# Altium PCB DRA818V Ham module.PcbDoc
Units mil, origin at the board's own origin, x right, y up, seen from the top; angles counter-clockwise.
Board outline 2870 x 2785 mil, 2 copper layers (Top Layer, Bottom Layer), stack 65.792 mil thick; 47 components, 29 nets, 159 pads, 92 vias.
Unrouted connection lines stored in the file: 1.
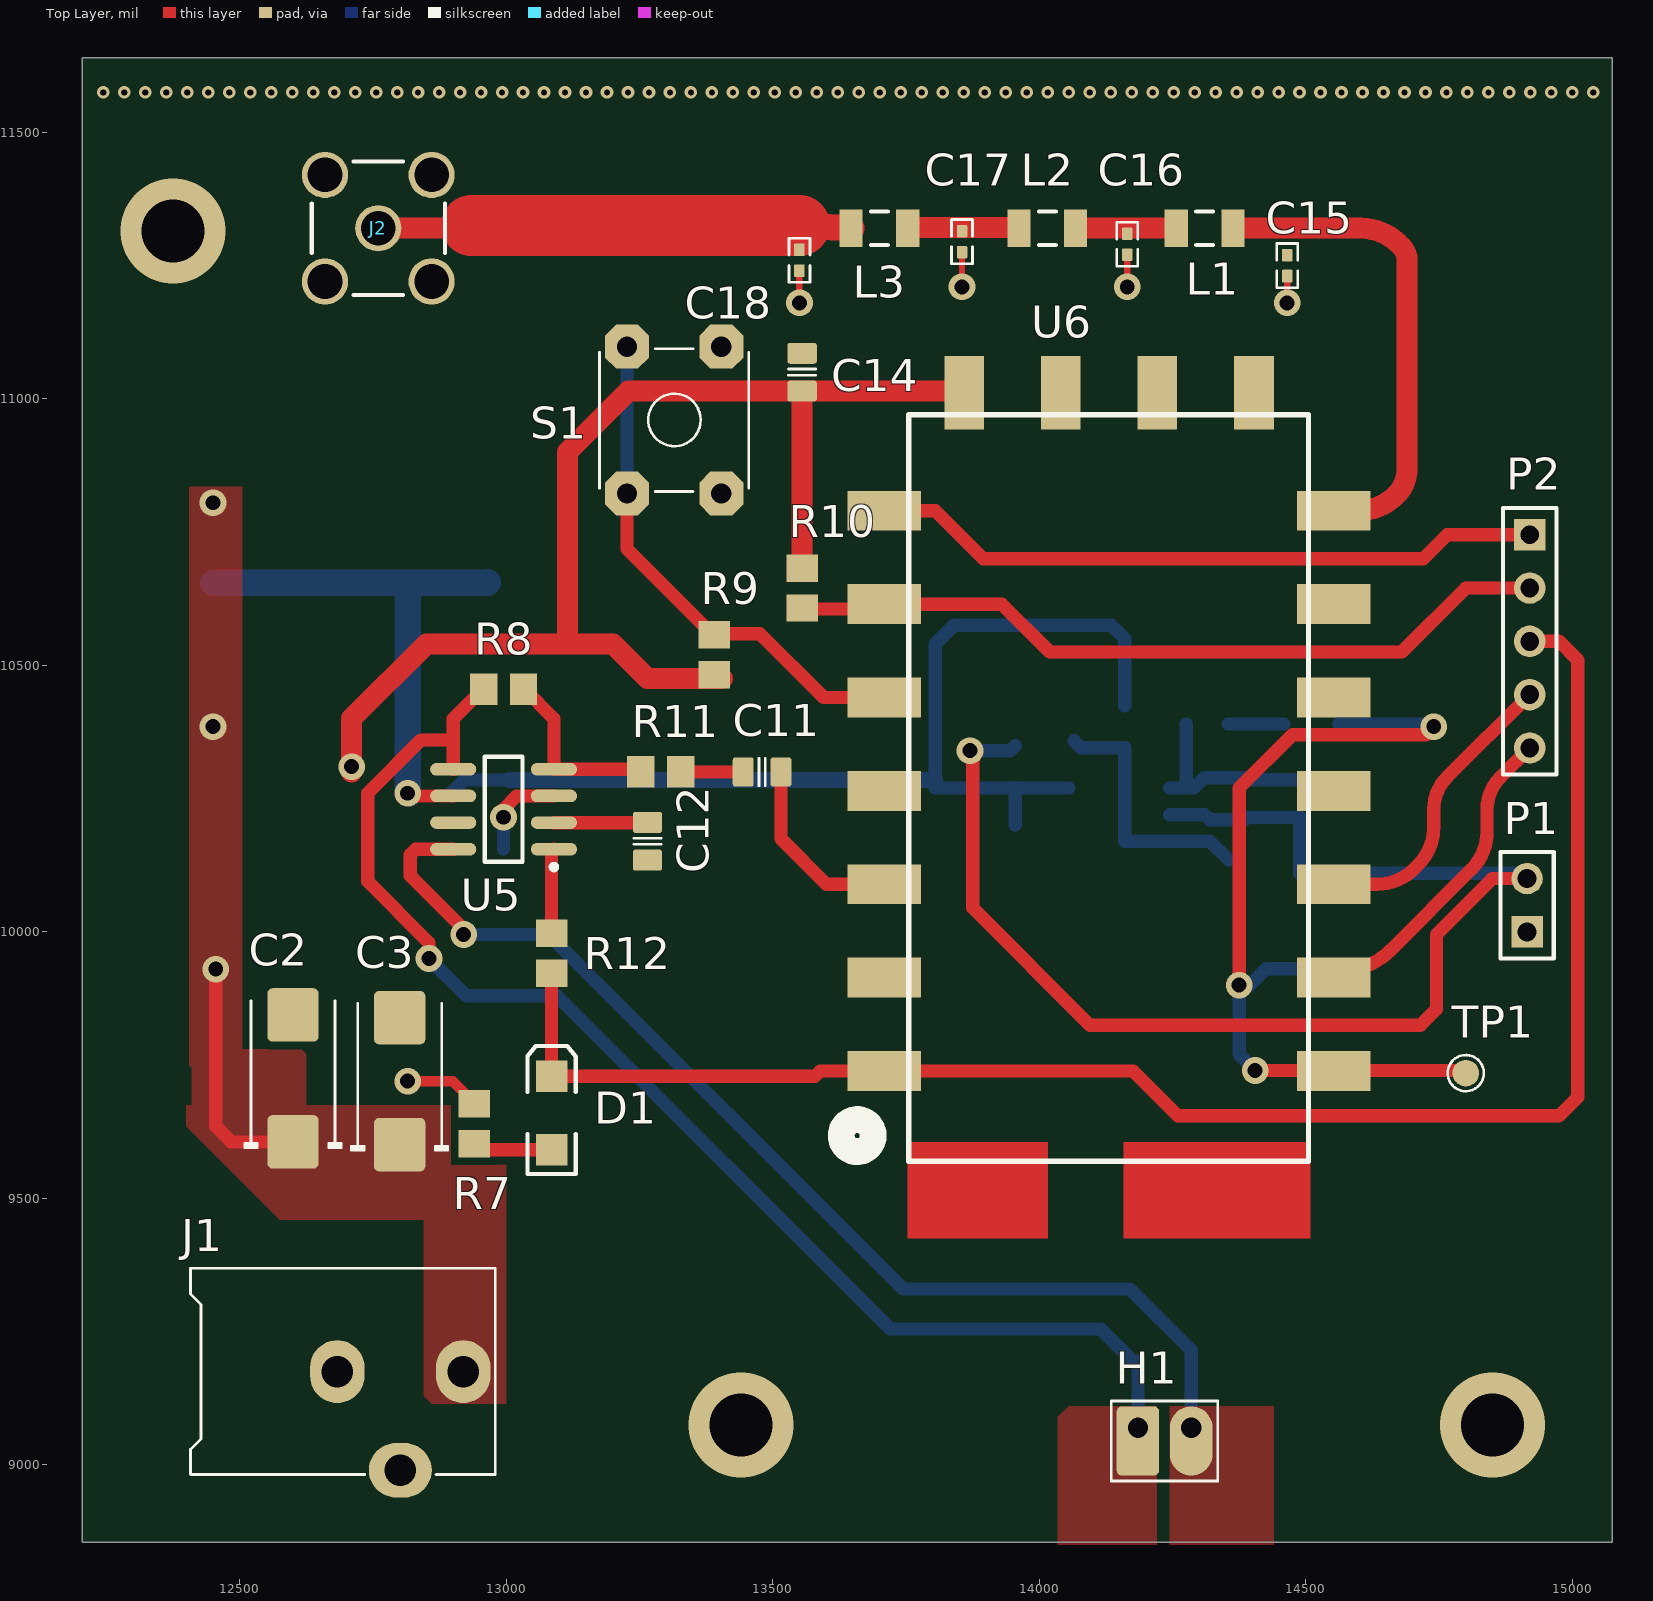
[diagram p0: Top Layer view]
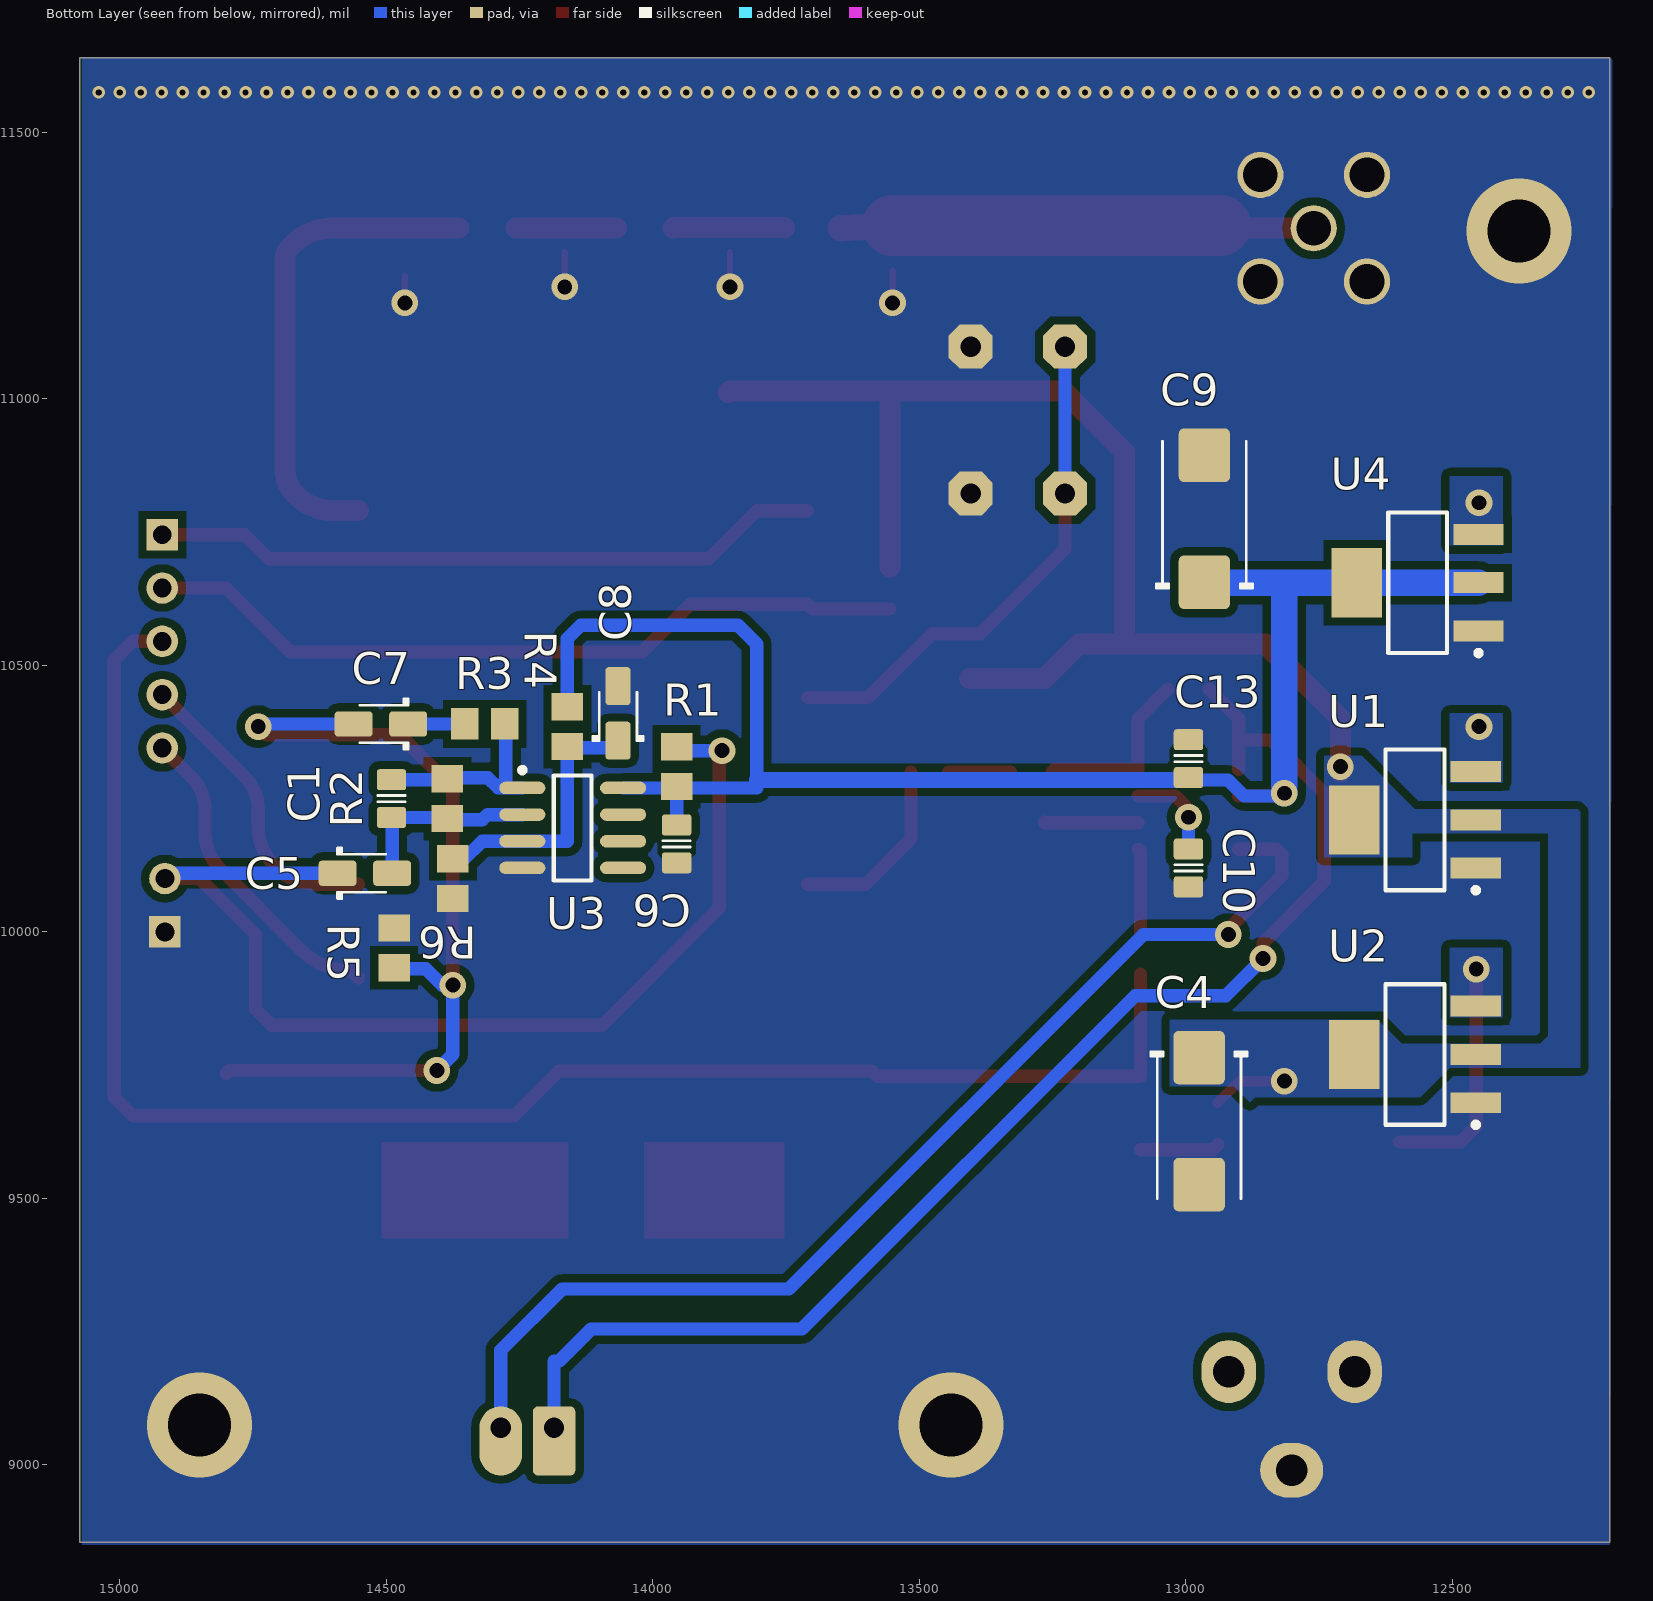
[diagram p1: Bottom Layer view, seen from below]

## Layer stack, top to bottom
Top Solder: solder mask 0.4, Solder Resist, Dk 3.5
Top Layer: signal copper 1.4
Dielectric 1: dielectric 62.992, FR-4, Dk 4.8
Bottom Layer: signal copper 1.4
Bottom Solder: solder mask 0.4, Solder Resist, Dk 3.5

## Board outline
12205,11640 15075,11640 15075,8855 12205,8855

## Design rules (kind name [scope] priority, off if disabled: settings)
Clearance [All] p1: gap=15
PolygonConnect [All] p1: connectstyle=Direct reliefconductorwidth=10 reliefentries=4 polygonreliefangle="90 Angle" airgapwidth=10
RoutingVias [All] p1: holewidth=28 width=50 viastyle="Through Hole" minholewidth=28 minwidth=50 maxholewidth=28 maxwidth=50
SolderMaskExpansion [All] p1: expansion=4
Width Width_1 [InNet('RF_OUT') And OnLayer('Top Layer')] p1: maxlimit=118.11 minlimit=10 preferedwidth=114.17 minimp=50.000000 maximp=50.000000 favimp=50.000000
Width [All] p2: maxlimit=114.17 minlimit=10 preferedwidth=20 bottomlayer_maxwidth=50 minimp=50.000000 maximp=50.000000 favimp=50.000000
30 further rules are at their usual default settings.

## Components (designator, comment, footprint, x,y, rotation, side; value= is the part's Value field where it differs from the comment)
C1 "approved sub OK" CAPC2012X135N 14490,10250 r90 bottom
C2 "100u" CAPMP7343X310N 12600,9725 r90 top
C3 "100u" CAPMP7343X310N 12800,9720 r90 top
C4 "330µ" CAPMP7343X310N 12975,9645 r270 bottom
C5 "4.7u" CAPMP3216X180N 14540,10110 r180 bottom
C6 "approved sub OK" CAPC2012X135N 13955,10165 r270 bottom
C7 "2.2u" CAPMP3216X180N 14510,10390 r0 bottom
C8 "2.2k" CAPMP3216X180N 14065,10410 r90 bottom
C9 "47u" CAPMP7343X310N 12965,10775 r90 bottom
C10 "approved sub OK" CAPC2012X135N 12995,10120 r270 bottom
C11 "approved sub OK" CAPC2012X135N 13480,10300 r180 top
C12 "approved sub OK" CAPC2012X135N 13265,10170 r90 top
C13 "approved sub OK" CAPC2012X135N 12995,10325 r270 bottom
C14 "approved sub OK" CAPC2012X135N 13555,11050 r90 top
C15 "1n" CAPC1005X55N 14465,11250 r270 top
C16 "1n" CAPC1005X55N 14165,11290 r270 top
C17 "1n" CAPC1005X55N 13855,11295 r270 top
C18 "1n" CAPC1005X55N 13550,11260 r270 top
D1 "LED2" 3.2X1.6X1.1 13085,9660 r90 top
H1 "Header" HDR_1x2_Offset 14235,9070 r90 top
J1 "CONN_PWR_JACK_2.1x5.5mm" CONN_PWR_JACK_2.1x5.5mm 12380,9175 r90 top
J2 "32K249-400L5" ROS-32K249-400L5_V 12760,11320 r0 top
L1 "Inductor" INDC3216 14310,11320 r180 top
L2 "Inductor" INDC3216 14015,11320 r180 top
L3 "Inductor" INDC3216 13700,11320 r180 top
P1 "Header 2" HDR1X2 14915,10000 r90 top
P2 "Header 5" HDR1X5 14920,10745 r270 top
R1 "Thick Film" ERA-0805 13955,10310 r90 bottom
R2 "Thick Film" ERA-0805 14385,10250 r90 bottom
R3 "Jumper" ERA-0805 14315,10390 r0 bottom
R4 "Thick Film" ERA-0805 14160,10385 r270 bottom
R5 "Jumper" 6-0805 14485,9970 r90 bottom
R6 "Thick Film" ERA-0805 14375,10100 r270 bottom
R7 "Jumper" ERA-0805 12940,9640 r90 top
R8 "Jumper" ERA-0805 12995,10455 r180 top
R9 "Jumper" ERA-0805 13390,10520 r90 top
R10 "Jumper" ERA-0805 13555,10645 r270 top
R11 "Jumper" ERA-0805 13290,10300 r180 top
R12 "Jumper" ERA-0805 13085,9960 r270 top
S1 "SW_THT_PB_7.0mm" TACT-SWITCH-TS1170 13315,10960 r270 top
TP1 "TESTPOINT" TP-R60 14800,9735 r0 top
U1 "LM1117IMP-3.3" MP04A_N 12570,10210 r0 bottom
U2 "LM1117IMP-3.3" MP04A_N 12570,9770 r0 bottom
U3 "LM358D" 751-02_N 14150,10195 r180 bottom
U4 "LM1117IMP-5.0" MP04A_N 12565,10655 r0 bottom
U5 "LM4871M/NOPB" M08A_N 12995,10230 r180 top
U6 "DRA818V" DRA818_BREAKOUT 14115,10295 r90 top

## Footprints (in the part's own frame and the unit in brackets; to place one, negate y for a bottom-side part, rotate by r counter-clockwise, add the part's x,y. Pads: shape width x height; smd on the part's side, far side on the other; paste and mask are expansions set on the pad)
3.2X1.6X1.1 [mm] "SMT LED; 2 Flat Leads"
  rect 1.5x1.5 smd: 1(-1.75,0) 2(1.75,0)
  silkscreen extent -2.9,-1.15 3.2,1.15
6-0805 [mm] "Chip Resistor; Body 2 x 1.2 mm (LxW typ)"
  rect 1.3x1.5 smd: 1(-0.95,0) 2(0.95,0)
751-02_N [mm] "SOIC, 8-Leads, Body 4.9x3.9mm, Pitch 1.27mm, IPC Medium Density"
  oval 2.2x0.6 smd: 1(-2.4,1.905) 2(-2.4,0.635) 3(-2.4,-0.635) 4(-2.4,-1.905) 5(2.4,-1.905) 6(2.4,-0.635) 7(2.4,0.635) 8(2.4,1.905)
  silkscreen extent -2.53,-2.5 0.9,2.88, body extent -1.95,-2.45 1.95,2.45, height 1.75
CAPC1005X55N [mm] "Chip Capacitor, Body 1.0x0.5mm, EIA 0402, IPC Medium Density"
  round 0.2 on Mech15: 0(0,0)
  rrect20% 0.6x0.5 smd: 1(-0.5,0) 2(0.5,0)
  Top Layer pour cut-out: -0.325,0.375 -0.2,0.5 0.2,0.5 0.325,0.375 0.325,-0.375 0.2,-0.5 -0.2,-0.5 -0.325,-0.375
  silkscreen extent -1.05,-0.5 1.05,0.5, body extent -0.52,-0.27 0.53,0.28, height 0.55
CAPC2012X135N [mm] "Chip Capacitor, Body 2.0x1.2mm, EIA 0805, IPC Medium Density"
  round 0.254 on Mech15: 0(0,0)
  rrect25% 1x1.4 smd: 1(-0.9,0) 2(0.9,0)
  Top Layer pour cut-out: -0.675,0.7 -0.475,0.9 0.475,0.9 0.675,0.7 0.675,-0.7 0.475,-0.9 -0.475,-0.9 -0.675,-0.7
  silkscreen extent -0.15,-0.65 0.15,0.65, body extent -1.1,-0.72 1.1,0.73, height 1.34
CAPMP3216X180N [mm] "Capacitor, polarized, Molded Body, EIA 535BAAC size A; 3.20mm L X 1.60mm W X 1.80mm H"
  round 0.508 on Mech15: 0(0,0)
  rrect25% 1.8x1.2 smd: 1(-1.3,0) 2(1.3,0)
  silkscreen extent -1.3,-1.2 1,1.2, body extent -1.6,-0.8 1.6,0.8, height 1.8
CAPMP7343X310N [mm] "Molded body capacitor, Body 7.3x4.3mm, 2917, IPC Nominal settings"
  round 1 on Mech15: 0(0,0)
  rrect20% 2.55x2.45 smd: 1(-3.025,0) 2(3.025,0)
  silkscreen extent -3.3,-2.3 3.7,2.3, body extent -3.8,-1.97 3.8,1.98, height 3.1
CONN_PWR_JACK_2.1x5.5mm [mm] "Power Connector, 2.1mm ID, 5.5mm OD"
  oval 3x2.6 hole 1.511: 1(0,-13.7) 2(0,-7.7)
  oval 2.6x3 hole 1.511: 3(-4.7,-10.7)
  silkscreen extent -4.9,-15.22 4.92,-0.7, body extent -4.9,-14.1 4.5,0, height 11
DRA818_BREAKOUT [mm]
  rect 1.9x3.5 smd: 1(-14.125,10.3) 2(-9.675,10.3) 3(-5.225,10.3) 4(-0.775,10.3) 5(3.675,10.3) 6(8.125,10.3) 7(12.575,10.3) 12(12.575,-11.1) 13(8.125,-11.1) 14(3.675,-11.1) 15(-0.775,-11.1) 16(-5.225,-11.1) 17(-9.675,-11.1) 18(-14.125,-11.1)
  rect 3.5x1.9 smd: 8(18.2,6.499) 9(18.2,1.9) 10(18.2,-2.701) 11(18.2,-7.301)
  Top Layer region: -22.1,-10 -17.5,-10 -17.5,-1.1 -22.1,-1.1
  Top Layer region: -22.1,2.5 -17.5,2.5 -17.5,9.2 -22.1,9.2
  silkscreen extent -18.41,-9.91 17.14,12.36, body extent -18.41,-9.91 17.14,9.14, height 3
ERA-0805 [mm] "Chip Resistor; Body 2 x 1.3 mm (LxW typ)"
  rect 1.3x1.5 smd: 1(-0.95,0) 2(0.95,0)
HDR1X2 [mm] "Connector; Header; 2 Position"
  rect 1.5x1.5 hole 0.9: 1(0,0)
  round 1.5 hole 0.9: 2(2.54,0)
  silkscreen extent -1.27,-1.27 3.81,1.27
HDR1X5 [mm] "Connector; Header; 5 Position"
  rect 1.5x1.5 hole 0.9: 1(0,0)
  round 1.5 hole 0.9: 2(2.54,0) 3(5.08,0) 4(7.62,0) 5(10.16,0)
  silkscreen extent -1.27,-1.27 11.43,1.27
HDR_1x2_Offset [mil]
  rrect25% 130x80 smd: 1(-25,50)
  rrect25% 130x80 smd far side: 1(-25,50)
  rrect25% 60x60 hole 38: 1(0,50)
  oval 130x80 smd: 2(-25,-50)
  oval 130x80 smd far side: 2(-25,-50)
  round 60 hole 38: 2(0,-50)
  silkscreen extent -100,-100 50,100
INDC3216 [mm] "Chip Inductor, Body 3.2x1.6mm, IPC High Density"
  rect 1.1x1.8 smd: 1(-1.35,0) 2(1.35,0)
  silkscreen extent -0.4,-0.8 0.4,0.8, body extent -1.7,-0.9 1.7,0.9, height 0.55
M08A_N [mm] "SOIC, 8-Leads, Body 4.9x3.9mm, Pitch 1.27mm, IPC Medium Density"
  oval 2.2x0.6 smd: 1(-2.4,1.905) 2(-2.4,0.635) 3(-2.4,-0.635) 4(-2.4,-1.905) 5(2.4,-1.905) 6(2.4,-0.635) 7(2.4,0.635) 8(2.4,1.905)
  silkscreen extent -2.53,-2.5 0.9,2.88, body extent -2,-2.5 2,2.5, height 1.75
MP04A_N [mm] "SOT223, 4-Leads, Body 6.5x3.5mm, Pitch 2.3mm, Lead Span 7mm, IPC Medium Density"
  rect 2.4x1 smd: 1(-2.9,2.3) 2(-2.9,0) 3(-2.9,-2.3)
  rect 2.4x3.3 smd: 4(2.9,0)
  silkscreen extent -3.02,-3.35 1.4,3.47, body extent -1.85,-3.35 1.85,3.35, height 1.8
ROS-32K249-400L5_V [mm] "SMA Right Angle Jack, 14.8x6.35x9.7mm, Rosenberger Recommended"
  round 2.2 hole 1.65: 1(0,0) MH(-2.54,-2.54) MH(-2.54,2.54) MH(2.54,-2.54) MH(2.54,2.54)
  silkscreen extent -3.17,-3.17 3.17,3.17, body extent -3.17,-3.18 3.17,11.62, height 9.7
TACT-SWITCH-TS1170 [mm] "Bondtact sealed TH tact switch"
  round 0.508 on Mech15: 0(0,0)
  oct 2.1x2.1 hole 0.965: 1(-3.5,-2.25) 1(3.5,-2.25) 2(-3.5,2.25) 2(3.5,2.25)
  silkscreen extent -3.4,-3.56 3.4,3.56, body extent -4.13,-3.25 4.13,3.25, height 7
TP-R60 [mil]
  round 50 smd paste-50: 1(0,0)
  silkscreen extent -34,-34 34,34, body extent -30,-30 30,30, height 10

## Part data
C1 C6 C10 C11 C12 C13 C14: library part CAPC_100n_0805_X7R_100V_10%, "Capacitor SMD Cer 100nF 10% 100V X7R 0805"
C2 C3 C4 C9: library part CAPT_330u_2917_6V3, "Capacitor SMD Tant 330uF 20% 6V3 2917"
C5 C7 C8: library part CAPT_33u_3216_6V3, "Capacitor SMD Tantalum 33uF 10% 6.3V 3216-18"
C15 C16 C17 C18: library part CAPC_1n_0402_X7R_16V_10%, "Capacitor SMD Cer 1nF 10% 16V X7R 0402"
D1: "Typical RED, GREEN, YELLOW, AMBER GaAs LED"
H1: library part Header2P, "Header, 2-pin"
J1: "Power Connector, THT, 2.1mm ID, 5.5mm OD"
J2: "SMA Right Angle Jack, Up to 18 GHz, -65 to 165 degC"
P1: "Header, 2-Pin"
P2: "Header, 5-Pin"
R1: library part RES_1K3_0805_1%, "Resistor SMD chip 1.3k Ohm 0.125W 1% 0805"
R2: library part RES_7K87_0805_1%, "Resistor SMD chip 7.87k Ohm 0.125W 1% 0805"
R3 R5 R7 R8 R9 R10 R11 R12: library part RES_0R_0805, "Resistor SMD chip 0.0 Ohm 0.125W 0805"
R4 R6: library part RES_100K_0805_1%, "Resistor SMD chip 100k Ohm 0.125W 1% 0805"
S1: "Switch, tact, 7.0mm stem"
TP1: "SMD test pin"
U1 U2 U4: "800mA Low-Dropout Linear Regulator, 4-pin SOT-223"
U3: "Dual Low-Power Operational Amplifier"
U5: "3W Audio Power Amplifier with Shutdown Mode, 8-pin Narrow SOIC, Pb-Free"

## Via types
v1: diameter 23.62, hole 11.81, Top Layer to Bottom Layer, 72 vias
v2: diameter 50, hole 28, Top Layer to Bottom Layer, 17 vias
v3: diameter 196.85, hole 118.11, Top Layer to Bottom Layer, 3 vias

## Nets (pads, with @x,y where several pads share a name; then routed paths per layer and width w, separated by ;. In a path a pad name is that pad's centre, name@x,y a point inside that pad or via, vN(x,y) a via of type N, cw(c..) or ccw(c..) an arc to the next point about the centre after c; other vN are vias at no path point)
3.3V: C4.1 C14.1 R7.2 R9.1 R10.1 U1.2 U1.4 U2.2 U2.4 U6.8 | length 2505.4
  Top Layer w20: v2(12815,9720) 12899.37,9720 R7.2@12940,9679.37
  Top Layer w39.37: v2@12710,10300 v2(12710,10310) 12710,10400 12850,10540 13115,10540 ; R9.1@13405.63,10475 13265,10475 13200,10540 13115,10540 ; R10.1@13555,10684.37 C14.1 ; U6.8 13856.1,11014.57 C14.1 ; 13115,10540 13115,10900 13229.57,11014.57 C14.1
5V: C6.1 C9.1 C13.2 R1.1 R4.1 U3.8 U4.2 U4.4 U5.6 | length 3085.7
  Top Layer w25: v2(12815,10260) 12820,10255 U5.6
  Bottom Layer w25: v2(12815,10260) 12815,10255 12890.87,10255 12920.87,10285 C13.2@13005.43,10285 ; 13805,10270 R1.1@13955,10270 ; 13805,10285 13805,10540 13840,10575 14135,10575 14160,10550 R4.1@14160,10424.37 ; C6.1 R1.1@13955,10270 ; R1.1@13955,10270.63 R1.1@13955,10270 ; U3.8 R1.1@13955,10270
  Bottom Layer w29.53: C13.2@13005.43,10285 13805,10285
  Bottom Layer w50: U4.2 U4.4 12815,10655 ; v2(12815,10260) 12815,10655 ; C9.1 12964.09,10655 12815,10655
12V: C2.1 C3.1 J1.1 U1.3 U2.3 U4.3 | length 452.1
  Top Layer w25: v2(12455,9930) 12455,9635 12484.09,9605.91 C2.1
  other v2: 12450,10385 12450,10805
AF: C11.1 U6.3 | length 354.8
  Top Layer w25: C11.1 13515.43,10174.57 13600.71,10089.29 U6.3
GND: C2.2 C3.2 C4.2 C6.2 C8.2 C9.2 C10.2 C12.1 C13.1 C14.2 C15.2 C16.2 C17.2 C18.2 J1.2 J1.3 J2.MH P1.1 R5.2 R6.2 S1.2 U1.1 U2.1 U3.4 U4.1 U5.7 U6.9 U6.10 | length 241.3
  Top Layer w12: v2(13550,11180) C18.2 ; v2(13855,11210) C17.2 ; v2(14165,11210) C16.2 C16.2@14165,11275.32 ; v2(14465,11180) C15.2
  other v1: 12244.1,11574.81 12283.47,11574.81 12322.84,11574.81 12362.21,11574.81 12401.58,11574.81 12440.95,11574.81 12480.32,11574.81 12519.69,11574.81 12559.06,11574.81 12598.43,11574.81 12637.8,11574.81 12677.17,11574.81 12716.54,11574.81 12755.91,11574.81 12795.28,11574.81 12834.65,11574.81 12874.02,11574.81 12913.39,11574.81 12952.76,11574.81 12992.13,11574.81 13031.5,11574.81 13070.87,11574.81 13110.24,11574.81 13149.61,11574.81 13188.98,11574.81 13228.35,11574.81 13267.72,11574.81 13307.09,11574.81 13346.46,11574.81 13385.83,11574.81 13425.2,11574.81 13464.57,11574.81 13503.94,11574.81 13543.31,11574.81 13582.68,11574.81 13622.05,11574.81 13661.42,11574.81 13700.79,11574.81 13740.16,11574.81 13779.53,11574.81 13818.91,11574.81 13858.28,11574.81 13897.65,11574.81 13937.02,11574.81 13976.39,11574.81 14015.76,11574.81 14055.13,11574.81 14094.5,11574.81 14133.87,11574.81 14173.24,11574.81 14212.61,11574.81 14251.98,11574.81 14291.35,11574.81 14330.72,11574.81 14370.09,11574.81 14409.46,11574.81 14448.83,11574.81 14488.2,11574.81 14527.57,11574.81 14566.94,11574.81 14606.31,11574.81 14645.68,11574.81 14685.05,11574.81 14724.42,11574.81 14763.79,11574.81 14803.16,11574.81 14842.53,11574.81 14881.9,11574.81 14921.27,11574.81 14960.64,11574.81 15000.01,11574.81 15039.38,11574.81
  other v3: 13440,9075 14850,9075 12375,11315
HL: P2.1 U6.7 | length 1266.5
  Top Layer w25: U6.7 13804.92,10790.08 13895,10700 14720,10700 14765,10745 P2.1
MIC_IN: C7.2 R5.1 TP1.1 U6.18 | length 1662.8
  Top Layer w25: v2(14375,9900) 14375,10270 14475,10370 14725,10370 v2(14740,10385) ; v2(14405,9740) 14795,9740 TP1.1
  Bottom Layer w25: v2(14405,9740) 14375,9770 v2(14375,9900) 14395,9900 14425.63,9930.63 R5.1@14485,9930.63 ; C7.2@14566.18,10385 C7.2 14735,10390 v2(14740,10385)
NetC1_1: C1.1 C5.2 R2.1 U3.2 | length 356.1
  Bottom Layer w25: U3.2 14310,10220 14319.37,10210.63 14385,10210.63 14388.94,10214.57 C1.1 14488.82,10213.39 C5.2
NetC1_2: C1.2 R2.2 R3.1 U3.1 | length 375.2
  Bottom Layer w25: U3.1 U3.1@14275.63,10270 ; R3.1@14275.63,10390 U3.1@14275.63,10270 ; C1.2 14388.94,10285.43 14385,10289.37 14309.37,10289.37 14290,10270 U3.1@14275.63,10270
NetC5_1: C5.1 P1.2 R1.2 | length 2043.9
  Top Layer w25: v2@13875,10345 13875,10045 14095,9825 14715,9825 14745,9855 14745,9995 14850,10100 P1.2
  Bottom Layer w25: v2(13870,10340) 13945.63,10340 R1.2@13955,10349.37 ; C5.1 14905,10110 P1.2
NetC7_1: C7.1 R3.2 | length 104.4
  Bottom Layer w25: R3.2@14354.37,10390 C7.1
NetC8_1: C8.1 R4.2 R6.1 U3.3 | length 486.2
  Bottom Layer w25: C8.1 14078.19,10345.63 14160,10345.63 14160,10170 U3.3 14320,10170 14355,10135 R6.1@14355.63,10135
NetC10_1: C10.1 U5.3 | length 179.4
  Top Layer w25: v2(12995,10215) 12995,10230 13020,10255 U5.3
  Bottom Layer w25: C10.1 v2(12995,10215)
NetC11_2: C11.2 R11.1 | length 115.2
  Top Layer w25: R11.1@13329.37,10300 C11.2
NetC12_2: C12.2 U5.2 | length 175.7
  Top Layer w25: U5.2 13264.57,10205 C12.2
NetC16_1: C16.1 L1.2 L2.1 | length 188.7
  Top Layer w39.37: L2.1 L1.2
NetC17_1: C17.1 L2.2 L3.1 | length 211.3
  Top Layer w39.37: L3.1 13753.15,11321.81 13960.04,11321.81 L2.2
NetC18_1: C18.1 J2.1 L3.2 | length 863.8
  Top Layer w39.37: J2.1@12760,11321.81 J2.1 12910,11320
  Top Layer w50: 13550,11325 L3.2
  Top Layer w114.17: 12935,11325 13550,11325
NetD1_1: D1.1 R7.1 | length 148.9
  Top Layer w25: R7.1@12940,9600.63 12949.53,9591.1 D1.1
NetH1_1: H1.1 R8.2 U5.5 | length 2500.1
  Top Layer w25: v2(12855,9950) 12855,9980 12740,10095 12740,10260 12840,10360 12900.51,10360 ; U5.5 12900.51,10360 ; R8.2@12955.63,10455 12900.51,10399.88 12900.51,10360
  Bottom Layer w25: v2(12855,9950) 12925,9880 13095,9880 13720,9255 14115,9255 14175,9195 14185,9195 H1.1@14185,9070
NetH1_2: H1.2 U5.8 | length 2099.2
  Top Layer w25: U5.8 12830,10155 12820,10145 12820,10105 v2@12920,10005
  Bottom Layer w25: v2(12920,9995) 13080,9995 13745,9330 14170,9330 14285,9215 H1.2@14285,9070
NetR8_1: R8.1 R11.2 U5.4 | length 336
  Top Layer w25: R8.1@13034.37,10455 13089.49,10399.88 U5.4 13245.63,10305 R11.2@13250.63,10300
NetR12_1: R12.1 U5.1 | length 157.5
  Top Layer w25: R12.1@13085,9999.37 13085,10150.51 U5.1
PD: P2.2 R10.2 U6.6 | length 1455.8
  Top Layer w25: R10.2@13555,10605.63 13700.24,10605.63 U6.6 13929.88,10614.88 14019.76,10525 14680,10525 14800,10645 P2.2
PTT: R9.2 S1.1 U6.5 | length 977.8
  Top Layer w25: S1.1@13226.42,10822.2 13226.42,10718.58 13385.63,10559.37 13475.63,10559.37 13595.31,10439.69 U6.5
  Bottom Layer w25: S1.1@13226.42,10822.2 S1.1@13226.42,11097.8
RF_OUT: C15.1 L1.1 U6.12 | length 926
  Top Layer w39.37: L1.1 14603.58,11320 cw(c14603.58,11220) 14674.29,11290.71 14679.39,11285.61 cw(c14653.79,11260) 14690,11260 14690,10869.18 cw(c14619.56,10869.18) 14669.37,10819.37 cw(c14598.66,10890.08) 14598.66,10790.08 U6.12
RXD: P2.4 U6.16 | length 567.6
  Top Layer w25: U6.16 14633.41,10089.29 ccw(c14633.41,10188) 14703.2,10118.2 14710.71,10125.71 ccw(c14640,10196.42) 14740,10196.42 14740,10230 cw(c14824.5,10230) 14764.75,10289.75 P2.4
SQ: D1.2 P2.3 R12.2 U6.1 | length 3094.6
  Top Layer w25: R12.2@13085,9920.63 D1.2 13578.9,9728.9 13588.9,9738.9 U6.1 14176.1,9738.9 14260,9655 14975,9655 15010,9690 15010,10510 14975,10545 P2.3
TXD: P2.5 U6.17 | length 602.1
  Top Layer w25: U6.17 14564.51,9926.59 ccw(c14564.51,10060.63) 14659.28,9965.85 14810.71,10117.28 ccw(c14740,10187.99) 14840,10187.99 14840,10230 cw(c14924.5,10230) 14864.75,10289.75 P2.5
pads on no net: C1.0 C2.0 C3.0 C4.0 C5.0 C6.0 C7.0 C8.0 C9.0 C10.0 C11.0 C12.0 C13.0 C14.0 C15.0 C16.0 C17.0 C18.0 S1.0 U3.5 U3.6 U3.7 U6.2 U6.4 U6.11 U6.13 U6.14 U6.15

## Polygon pours and split planes (outlines as drawn)
NetH1_2 on Top Layer "Top Layer-NetH1_1" (solid, pour order 26): 14245,9110 14245,8850 14440,8850 14440,9110
NetH1_1 on Top Layer "Top Layer-NetH1_1" (solid, pour order 24): 14220,9110 14055,9110 14035,9090 14035,8850 14220,8850
12V on Top Layer "Top Layer-No Net" (solid, pour order 6): 12410,9675 12410,9745 12405,9750 12405,10835 12505,10835 12505,9780 12615,9780 12625,9770 12625,9675
12V on Top Layer "Top Layer-No Net" (solid, pour order 2): 13000,9115 12860,9115 12855,9120 12845,9130 12845,9460 12575,9460 12400,9635 12400,9675 12985,9675 13000,9660
12V on Bottom Layer "Top Layer-No Net" (solid, pour order 12): 12505,10725 12505,10855 12405,10855 12405,10725
12V on Bottom Layer "Top Layer-No Net" (solid, pour order 10): 12505,10280 12505,10410 12405,10410 12405,10280
12V on Bottom Layer "Top Layer-No Net" (solid, pour order 8): 12505,9840 12505,9970 12405,9970 12405,9840
3.3V on Bottom Layer "Top Layer-No Net" (solid, pour order 4): 13030,9710 12910,9710 12880,9680 12870,9690 12580,9690 12560,9690 12505,9745 12260,9745 12260,10225 12265,10230 12400,10230 12570,10230 12670,10330 12740,10330 12740,10140 12575,10140 12575,10185 12320,10185 12320,9805 12325,9800 12335,9790 12595,9790 12640,9835 13025,9835 13030,9835
GND on Bottom Layer "Top Layer-No Net" (solid, remove dead copper, pour order 14): 12199.74,11640 15070,11640 15070,8850 12205,8850
NetH1_1 on Top Solder "Top Layer-NetH1_1" (solid): 14035,9110 14225,9110 14225,8850 14035,8850
NetH1_2 on Top Solder "Top Layer-NetH1_1" (solid): 14245,9110 14440,9110 14440,8850 14245,8850

## Silkscreen, mask and mechanical layers (free items; w line width, h text height)
Top Solder:
  rectangle: 14160,9425 14510,9605
  rectangle: 13750,9425 14015,9605
Mechanical 1:
  lines w10: 12190,8860 12205,8875 12205,11640 15075,11640 15075,8850 15065,8860 12190,8860